# Altium PCB UZ_D_IncrEncd_v2.PcbDoc (part 1 of 2)
Units mm, origin at the board's own origin, x right, y up, seen from the top; angles counter-clockwise.
Board outline 155.99 x 100.01 mm, 2 copper layers (Top Layer, Bottom Layer), stack 0.45 mm thick; 60 components, 97 nets, 455 pads, 49 vias.
Unrouted connection lines stored in the file: 26.
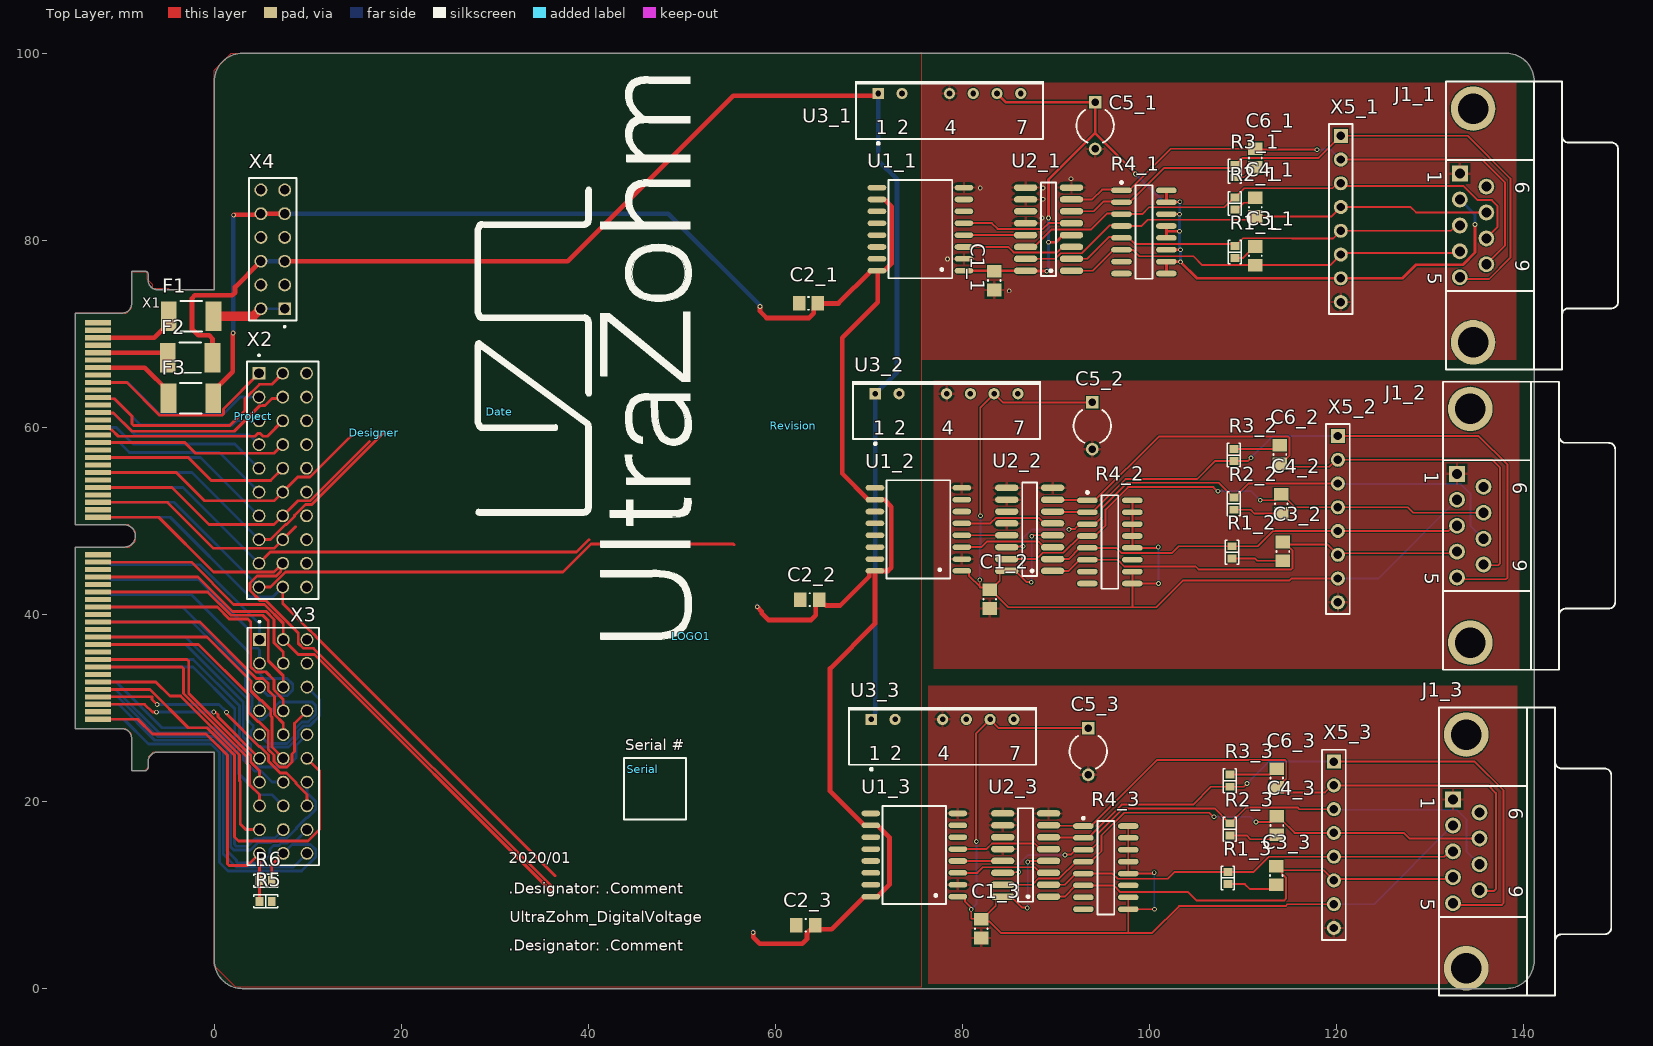
[diagram p0: Top Layer view]
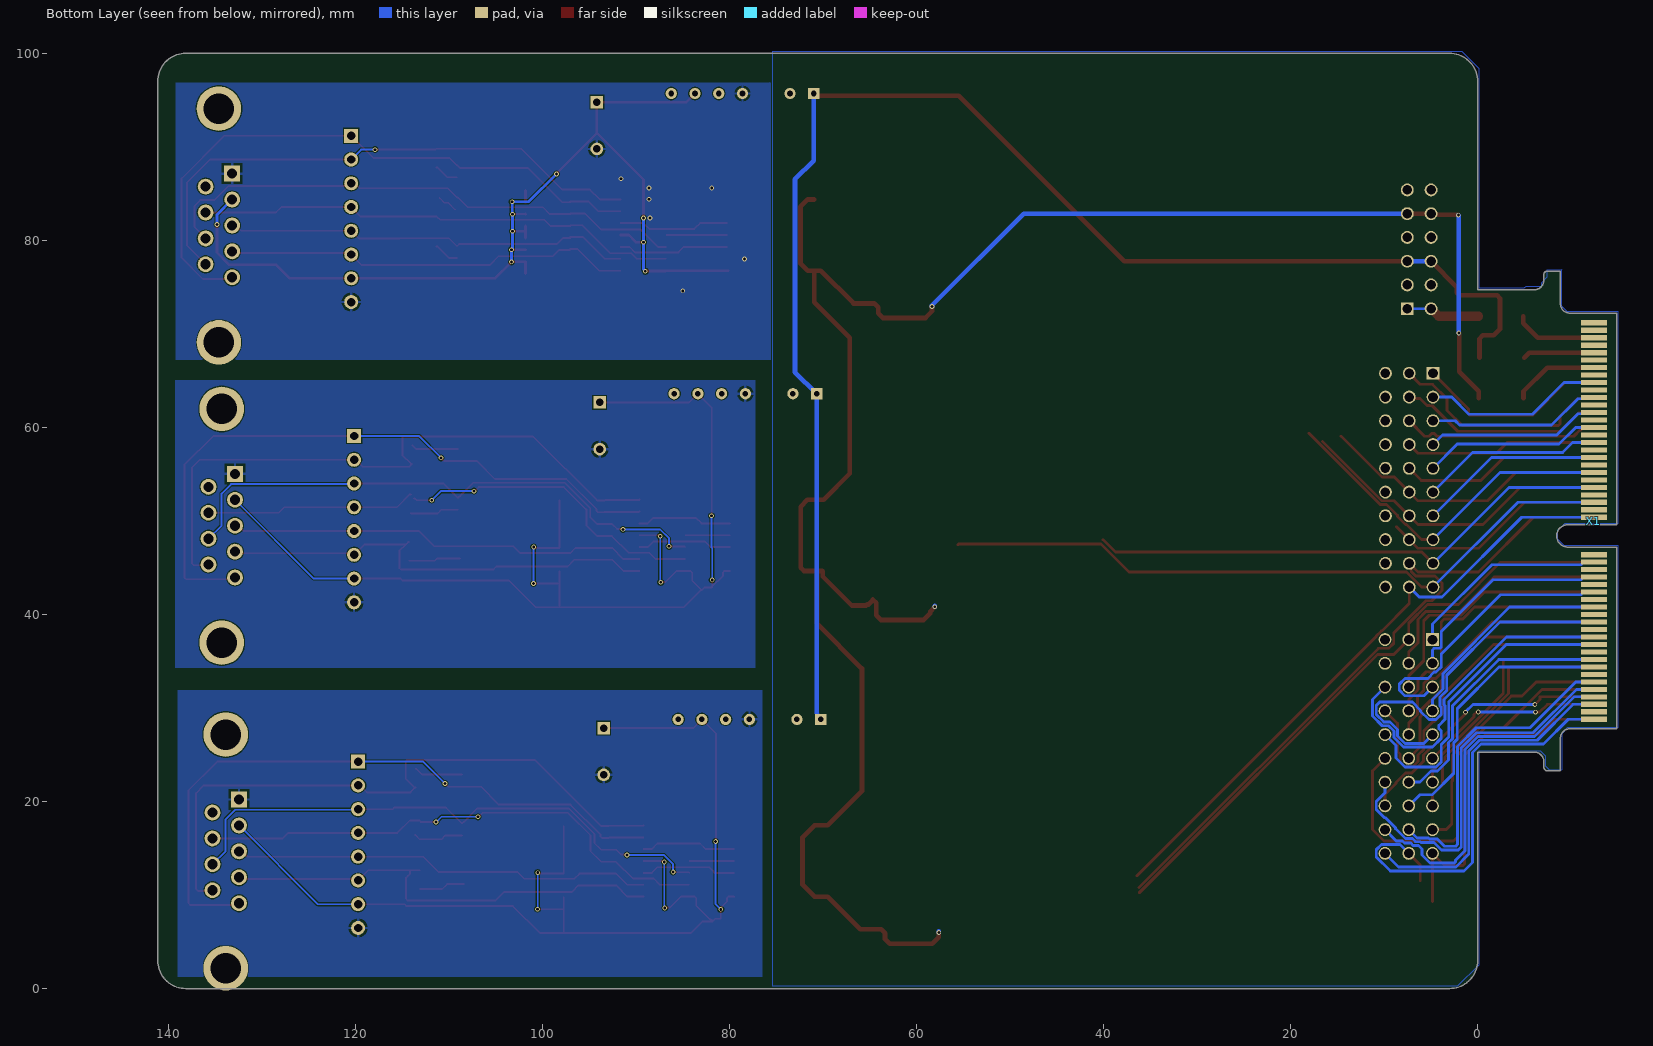
[diagram p1: Bottom Layer view, seen from below]

## Layer stack, top to bottom
Top Solder: solder mask 0.01, Solder Resist, Dk 3.5
Top Layer: signal copper 0.035
Dielectric 1: core 0.38, Core-036, Dk 4.4
Bottom Layer: signal copper 0.035
Bottom Solder: solder mask 0.01, Solder Resist, Dk 3.5

## Board outline
-14.853,27.775 -9.853,27.775 cw(c-9.853,26.775) -8.853,26.775 -8.853,23.275 -7.473,23.275 ccw(c-7.473,23.675) -7.073,23.675 -7.073,24.275 cw(c-6.073,24.275) -6.073,25.275 0,25.275 0,3 ccw(c3,3) 3,0 138.141,0 ccw(c138.141,3) 141.141,3 141.141,97 141.141,97.01 ccw(c138.141,97.01) 138.141,100.01 3,100 ccw(c3,97) 0,97 0,74.725 -6.073,74.725 cw(c-6.073,75.725) -7.073,75.725 -7.073,76.325 ccw(c-7.473,76.325) -7.473,76.725 -8.853,76.725 -8.853,73.225 cw(c-9.853,73.225) -9.853,72.225 -14.853,72.225 -14.853,49.6 -9.653,49.6 cw(c-9.653,48.4) -9.653,47.2 -14.853,47.2

## Design rules (kind name [scope] priority, off if disabled: settings)
AssemblyTestPointUsage [InNetClass('3V3_SingleEnded') or InNetClass('5V_SingleEnded') or InNetClass('15V_SingleEnded') or InNetClass('DifferentialSignals')] p1:
Clearance Clearance_Differential [InNetClass('DifferentialSignals')] p1: gap=0.1 ignorepadtopadclearanceinfootprint=TRUE except(0: Arc-Hole Track-Hole SMDPad-Hole THPad-Hole Via-Hole Fill-Hole Poly-Hole Region-Hole Text-Hole; 0.3: SMDPad-Via; 0.4: THPad-Via)
Clearance Clearance_Power [InNetClass('Power')] p2: gap=0.1 ignorepadtopadclearanceinfootprint=TRUE except(0: Arc-Hole Track-Hole SMDPad-Hole THPad-Hole Via-Hole Fill-Hole Poly-Hole Region-Hole Text-Hole; 0.15: Via-Poly; 0.2: Track-Poly; 0.25: THPad-Poly; 0.3: Fill-Poly Poly-Region; 0.5: Poly-Poly)
Clearance [All] p3: gap=0.1 ignorepadtopadclearanceinfootprint=TRUE except(0: Arc-Hole Track-Hole SMDPad-Hole THPad-Hole Via-Hole Fill-Hole Poly-Hole Region-Hole Text-Hole; 0.4: SMDPad-Via THPad-Via; 0.5: Poly-Poly)
ComponentClearance [All] p1: gap=0.1 collisioncheckmode=3 verticalgap=0.1 showdistances=FALSE
DiffPairsRouting [InNetClass('DifferentialSignals')] p1: maxlimit=0.127 minlimit=0.127 mostfreqgap=0.127 toplayer_minwidth=0.1 toplayer_maxwidth=0.285 toplayer_prefwidth=0.232 bottomlayer_minwidth=0.1 bottomlayer_maxwidth=0.285 bottomlayer_prefwidth=0.232 impedanceprofiledriven=TRUE impedanceprofileid={5F7DE71B-7B0B-4CDE-8AE7-8AD61221F3A5} impedanceprofilevalue=100.000000 maxuncoupledlength=12.7
FanoutControl Fanout_Power [InNetClass('Power') or InNet('ENABLE')] p1: bgadir=Out bgaviamode=Centered fanoutstyle=Auto fanoutdirection=None viagrid=0.025
FanoutControl Fanout_RS422 [InNetClass('DifferentialSignals')] p2: bgadir=Out bgaviamode=Closest fanoutstyle=Rows fanoutdirection=OutOnly viagrid=0.025
FanoutControl Fanout_BGA [IsBGA] p3 off: bgadir=Out bgaviamode=Centered fanoutstyle=Auto fanoutdirection=Alternating viagrid=0.025 // Fanout_BGA (Default Rule)
FanoutControl Fanout_LCC [IsLCC] p4 off: bgadir=Out bgaviamode=Centered fanoutstyle=Auto fanoutdirection=Alternating viagrid=0.025 // Fanout_LCC (Default Rule)
FanoutControl Fanout_SOIC [IsSOIC] p5 off: bgadir=Out bgaviamode=Centered fanoutstyle=Auto fanoutdirection=Alternating viagrid=0.025 // Fanout_SOIC (Default Rule)
FanoutControl Fanout_Small [(CompPinCount < 5)] p6 off: bgadir=Out bgaviamode=Centered fanoutstyle=Auto fanoutdirection=OutThenIn viagrid=0.025 // Fanout_Small (Default Rule)
FanoutControl Fanout_Default [All] p7: bgadir=NE bgaviamode=Closest fanoutstyle=Rows fanoutdirection=InOnly viagrid=0.025 // Fanout_Default (Default Rule)
Height [All] p1: minheight=0 maxheight=50 prefheight=12.7
HoleSize [All] p1: absolutevalues=TRUE maxlimit=4 minlimit=0.025 maxpercent=80.000 minpercent=20.000
PolygonConnect PolygonConnect_Therm [HoleSize > 2.6] p1: connectstyle=Direct reliefconductorwidth=0.254 reliefentries=4 polygonreliefangle="90 Angle" airgapwidth=0.254
PolygonConnect PolygonConnect_via [InPadClass('pad') or IsVia] p2: connectstyle=Direct reliefconductorwidth=0.254 reliefentries=4 polygonreliefangle="90 Angle" airgapwidth=0.254
PolygonConnect [All] p3: connectstyle=Relief reliefconductorwidth=0.3 reliefentries=4 polygonreliefangle="90 Angle" airgapwidth=0.25
RoomDefinition Encoder2 [InComponentClass('Encoder2')] p1: confinementstyle=ConfineIn formatcopy=TRUE lockcomponents=FALSE outline 54.61,33.223 152.756,33.223 152.756,68.174 54.61,68.174
RoomDefinition Encoder3 [InComponentClass('Encoder3')] p2: confinementstyle=ConfineIn formatcopy=TRUE lockcomponents=FALSE outline 54.178,-1.6 152.324,-1.6 152.324,33.35 54.178,33.35
RoomDefinition Connector [InComponentClass('Connector')] p3: confinementstyle=ConfineIn formatcopy=TRUE lockcomponents=FALSE outline -17.069,-8.128 22.936,-8.128 22.936,114.6 -17.069,114.6
RoomDefinition Encoder1 [InComponentClass('Encoder1')] p4: confinementstyle=ConfineIn formatcopy=TRUE lockcomponents=FALSE outline 54.915,65.329 153.06,65.329 153.06,100.279 54.915,100.279
RoomDefinition X1 [InComponentClass('X1')] p5: confinementstyle=ConfineIn formatcopy=TRUE lockcomponents=FALSE outline -46.221,5.207 20.015,5.207 20.015,82.8 -46.221,82.8
RoutingLayers RoutingLayers_3V3Signals [InNetClass('3V3_SingleEnded')] p1 off: top layer_v5=TRUE bottom layer_v5=TRUE
RoutingLayers RoutingLayers_SingleEnded [InNetClass('15V_SingleEnded') or InNetClass('3V3_SingleEnded') or InNetClass('5V_SingleEnded')] p2 off: top layer_v5=TRUE bottom layer_v5=TRUE
RoutingLayers RoutingLayers_Differential [InNetClass('DifferentialSignals')] p3 off: top layer_v5=TRUE bottom layer_v5=FALSE
RoutingLayers [All] p4: top layer_v5=TRUE bottom layer_v5=TRUE
RoutingVias [All] p1: holewidth=0.3 width=0.5 viastyle="Through Hole" minholewidth=0.2 minwidth=0.4 maxholewidth=0.5 maxwidth=1
SolderMaskExpansion [All] p1: expansion=0.102 istentingtop=FALSE
UnRoutedNet UnRoutedNet_Signals [InNetClass('15V_SingleEnded') or InNetClass('3V3_SingleEnded') or InNetClass('5V_SingleEnded') or InNetClass('DifferentialSignals')] p1: checkbadconnections=TRUE
UnRoutedNet [All] p2: checkbadconnections=TRUE
Width Width_Power [InNetClass('Power')] p1: maxlimit=10 minlimit=0.2 preferedwidth=0.3 minimp=50.000000 maximp=50.000000 favimp=50.000000
Width [All] p2: maxlimit=10 minlimit=0.1 preferedwidth=0.2
18 further rules are at their usual default settings.

## Classes and differential pairs
channel class Encoder: Encoder1 Encoder2 Encoder3
component class Encoder2: C1_2 C2_2 C3_2 C4_2 C5_2 C6_2 J1_2 R1_2 R2_2 R3_2 R4_2 U1_2 U2_2 U3_2 X5_2
component class Encoder1: C1_1 C2_1 C3_1 C4_1 C5_1 C6_1 J1_1 R1_1 R2_1 R3_1 R4_1 U1_1 U2_1 U3_1 X5_1
component class Encoder3: C1_3 C2_3 C3_3 C4_3 C5_3 C6_3 J1_3 R1_3 R2_3 R3_3 R4_3 U1_3 U2_3 U3_3 X5_3
component class Connector: F1 F2 F3 X2 X3 X4
component class X1: R5 R6 X1

## Components (designator, comment, footprint, x,y, rotation, side; value= is the part's Value field where it differs from the comment)
C1_1 "0.1 µF" C_0805 83.4,75.7 r90 top (schematic designator C1)
C1_2 "0.1 µF" C_0805 82.906,41.631 r90 top (schematic designator C1)
C1_3 "0.1 µF" C_0805 81.991,6.401 r90 top (schematic designator C1)
C2_1 "0.1 µF" C_0805 63.525,73.254 r0 top (schematic designator C2)
C2_2 "0.1 µF" C_0805 63.669,41.596 r0 top (schematic designator C2)
C2_3 "0.1 µF" C_0805 63.237,6.773 r0 top (schematic designator C2)
C3_1 "0.01 µF" C_0805 111.328,78.348 r270 top (schematic designator C3)
C3_2 "0.01 µF" C_0805 114.262,46.742 r90 top (schematic designator C3)
C3_3 "0.01 µF" C_0805 113.555,12.091 r90 top (schematic designator C3)
C4_1 "0.01 µF" C_0805 111.328,83.55 r270 top (schematic designator C4)
C4_2 "0.01 µF" C_0805 114.071,51.841 r90 top (schematic designator C4)
C4_3 "0.01 µF" C_0805 113.614,17.424 r90 top (schematic designator C4)
C5_1 "10 µF" CAPR5-4X5 94.183,92.278 r270 top (schematic designator C5)
C5_2 "10 µF" CAPR5-4X5 93.878,60.173 r270 top (schematic designator C5)
C5_3 "10 µF" CAPR5-4X5 93.447,25.349 r270 top (schematic designator C5)
C6_1 "0.01 µF" C_0805 111.328,88.8 r90 top (schematic designator C6)
C6_2 "0.01 µF" C_0805 113.944,57.099 r270 top (schematic designator C6)
C6_3 "0.01 µF" C_0805 113.589,22.504 r270 top (schematic designator C6)
Date "2020/01" COMMENT 30.531,61.697 r90 top
Designer "Michaela Hlatky" Designator:comment 17.094,59.436 r90 top
F1 "Littelfuse_PTC_1812" 1812_PTC_Polyfuse_Littelfuse -2.489,71.882 r0 top value="PTC, 1.1 A, 24V"
F2 "Littelfuse_PTC_1812" 1812_PTC_Polyfuse_Littelfuse -2.591,67.462 r0 top value="PTC, 1.1 A, 24V"
F3 "Littelfuse_PTC_1812" 1812_PTC_Polyfuse_Littelfuse -2.515,63.119 r0 top value="PTC, 1.1 A, 24V"
J1_1 "DSUB1.385-2H9" DSUB1.385-2H9 144.1,81.595 r270 top (schematic designator J1)
J1_2 "DSUB1.385-2H9" DSUB1.385-2H9 143.795,49.489 r270 top (schematic designator J1)
J1_3 "DSUB1.385-2H9" DSUB1.385-2H9 143.363,14.666 r270 top (schematic designator J1)
LOGO1 "UZ Logo" UZ_Logo_large 51.003,37.643 r90 top
Project "UltraZohm_DigitalVoltage" COMMENT 4.147,61.188 r90 top
R1_1 "120R" "RES 0603_1608" 109.118,78.749 r270 top (schematic designator R1)
R1_2 "120R" "RES 0603_1608" 108.814,46.644 r270 top (schematic designator R1)
R1_3 "120R" "RES 0603_1608" 108.382,11.821 r270 top (schematic designator R1)
R2_1 "120R" "RES 0603_1608" 109.118,83.951 r270 top (schematic designator R2)
R2_2 "120R" "RES 0603_1608" 109.017,51.846 r270 top (schematic designator R2)
R2_3 "120R" "RES 0603_1608" 108.585,17.023 r270 top (schematic designator R2)
R3_1 "120R" "RES 0603_1608" 109.118,87.4 r270 top (schematic designator R3)
R3_2 "120R" "RES 0603_1608" 109.017,57.048 r90 top (schematic designator R3)
R3_3 "120R" "RES 0603_1608" 108.585,22.225 r90 top (schematic designator R3)
R4_1 "Res Pack3" SO-16_N 99.4,80.9 r0 top value=4.7K (schematic designator R4)
R4_2 "Res Pack3" SO-16_N 95.758,47.752 r0 top value=4.7K (schematic designator R4)
R4_3 "Res Pack3" SO-16_N 95.326,12.929 r0 top value=4.7K (schematic designator R4)
R5 "R_TF" "RES 0603_1608" 5.486,9.322 r180 top value=0R
R6 "R_TF" "RES 0603_1608" 5.486,11.532 r0 top value=0R
Revision "1v00" Designator:comment 61.874,60.173 r90 top
Serial "Serial #" SERIAL 45.822,23.47 r0 top
U1_1 "ISO7230MDW" "TI ISO7230 SOIC" 75.5,81.2 r180 top (schematic designator U1)
U1_2 "ISO7230MDW" "TI ISO7230 SOIC" 75.284,49.098 r180 top (schematic designator U1)
U1_3 "ISO7230MDW" "TI ISO7230 SOIC" 74.852,14.275 r180 top (schematic designator U1)
U2_1 "DS26LS32ACM" M16A_M 89.2,81.2 r180 top (schematic designator U2)
U2_2 "DS26LS32ACM" M16A_M 87.184,49.098 r180 top (schematic designator U2)
U2_3 "DS26LS32ACM" M16A_M 86.752,14.275 r180 top (schematic designator U2)
U3_1 "TMH 0505S" SIL-6(7) 78.605,95.708 r0 top (schematic designator U3)
U3_2 "TMH 0505S" SIL-6(7) 78.3,63.602 r0 top (schematic designator U3)
U3_3 "TMH 0505S" SIL-6(7) 77.869,28.779 r0 top (schematic designator U3)
X1 "HSEC8-150-01-XX-DV-A-BL-CARD" HSEC8-150-01-XX-DV-A-BL-CARD -14.84,49.991 r270 bottom
X2 "Pin Header" SAMTEC_TSW-110-07-F-T 7.315,54.356 r270 top
X3 "Pin Header" SAMTEC_TSW-110-07-F-T 7.366,25.883 r270 top
X4 "Pin Header" SAMTEC_TSW-106-07-F-D 6.248,79.045 r90 top
X5_1 "Pin Header" HDR1X8 120.447,91.186 r270 top (schematic designator X5)
X5_2 "Pin Header" HDR1X8 120.142,59.08 r270 top (schematic designator X5)
X5_3 "Pin Header" HDR1X8 119.71,24.257 r270 top (schematic designator X5)

## Footprints (in the part's own frame and the unit in brackets; to place one, negate y for a bottom-side part, rotate by r counter-clockwise, add the part's x,y. Pads: shape width x height; smd on the part's side, far side on the other; paste and mask are expansions set on the pad)
1812_PTC_Polyfuse_Littelfuse [mm] "Chip Fuse, 2-Leads, Body 4.6x3.24mm"
  rect 1.68x3.14 smd: 1(-2.39,0) 2(2.39,0)
  silkscreen extent -1.15,-1.62 1.15,1.62, body extent -2.3,-1.62 2.3,1.62, height 1.15
C_0805 [mm] "Chip Capacitor, Body 2.0x1.2mm, Height 1.45mm, IPC Low Density"
  rect 1.35x1.55 smd: 1(-1,0) 2(1,0)
  silkscreen extent -0.05,-0.67 0.05,0.67, body extent -1.1,-0.72 1.1,0.72, height 1.45
CAPR5-4X5 [mm] "Capacitor; 2 Leads"
  rect 1.35x1.35 hole 0.8: 1(-2.5,0)
  round 1.35 hole 0.8: 2(2.5,0)
  silkscreen extent -1.69,-2 1.82,2
COMMENT [mm] "prints out the comment of a component"
Designator:comment [mm] "prints out designator and comment of a component"
DSUB1.385-2H9 [mm] "Connector; D Subminiature; 9 Position; Right Angle; Pitch 1.385 mm"
  rect 1.69x1.69 hole 1.09: 1(-5.54,-10.92)
  round 1.69 hole 1.09: 2(-2.77,-10.92) 3(0,-10.92) 4(2.77,-10.92) 5(5.54,-10.92) 6(-4.155,-8.08) 7(-1.385,-8.08) 8(1.385,-8.08) 9(4.155,-8.08)
  round 4.76 hole 3.26: 10(-12.495,-9.5) 11(12.495,-9.5)
  silkscreen extent -15.4,-12.4 15.4,6
HDR1X8 [mm] "Connector; Header; 8 Position"
  rect 1.5x1.5 hole 0.9: 1(0,0)
  round 1.5 hole 0.9: 2(2.54,0) 3(5.08,0) 4(7.62,0) 5(10.16,0) 6(12.7,0) 7(15.24,0) 8(17.78,0)
  silkscreen extent -1.27,-1.27 19.05,1.27
HSEC8-150-01-XX-DV-A-BL-CARD [mm]
  rect 0.55x2.8 smd far side mask+0.05: 1(-21.2,-2.4) 3(-20.4,-2.4) 5(-19.6,-2.4) 7(-18.8,-2.4) 9(-18,-2.4) 11(-17.2,-2.4) 13(-16.4,-2.4) 15(-15.6,-2.4) 17(-14.8,-2.4) 19(-14,-2.4) 21(-13.2,-2.4) 23(-12.4,-2.4) 25(-11.6,-2.4) 27(-10.8,-2.4) 29(-10,-2.4) 31(-9.2,-2.4) 33(-8.4,-2.4) 35(-7.6,-2.4) 37(-6.8,-2.4) 39(-6,-2.4) 41(-5.2,-2.4) 43(-4.4,-2.4) 45(-3.6,-2.4) 47(-2.8,-2.4) 49(-2,-2.4) 51(-1.2,-2.4) 53(-0.4,-2.4) 55(3.6,-2.4) 57(4.4,-2.4) 59(5.2,-2.4) 61(6,-2.4) 63(6.8,-2.4) 65(7.6,-2.4) 67(8.4,-2.4) 69(9.2,-2.4) 71(10,-2.4) 73(10.8,-2.4) 75(11.6,-2.4) 77(12.4,-2.4) 79(13.2,-2.4) 81(14,-2.4) 83(14.8,-2.4) 85(15.6,-2.4) 87(16.4,-2.4) 89(17.2,-2.4) 91(18,-2.4) 93(18.8,-2.4) 95(19.6,-2.4) 97(20.4,-2.4) 99(21.2,-2.4)
  rect 0.55x2.8 smd mask+0.05: 2(-21.2,-2.4) 4(-20.4,-2.4) 6(-19.6,-2.4) 8(-18.8,-2.4) 10(-18,-2.4) 12(-17.2,-2.4) 14(-16.4,-2.4) 16(-15.6,-2.4) 18(-14.8,-2.4) 20(-14,-2.4) 22(-13.2,-2.4) 24(-12.4,-2.4) 26(-11.6,-2.4) 28(-10.8,-2.4) 30(-10,-2.4) 32(-9.2,-2.4) 34(-8.4,-2.4) 36(-7.6,-2.4) 38(-6.8,-2.4) 40(-6,-2.4) 42(-5.2,-2.4) 44(-4.4,-2.4) 46(-3.6,-2.4) 48(-2.8,-2.4) 50(-2,-2.4) 52(-1.2,-2.4) 54(-0.4,-2.4) 56(3.6,-2.4) 58(4.4,-2.4) 60(5.2,-2.4) 62(6,-2.4) 64(6.8,-2.4) 66(7.6,-2.4) 68(8.4,-2.4) 70(9.2,-2.4) 72(10,-2.4) 74(10.8,-2.4) 76(11.6,-2.4) 78(12.4,-2.4) 80(13.2,-2.4) 82(14,-2.4) 84(14.8,-2.4) 86(15.6,-2.4) 88(16.4,-2.4) 90(17.2,-2.4) 92(18,-2.4) 94(18.8,-2.4) 96(19.6,-2.4) 98(20.4,-2.4) 100(21.2,-2.4)
M16A_M [mm] "SOIC, 16-Leads, Body 9.9x3.9mm, Pitch 1.27mm, IPC Low Density"
  oval 2.5x0.7 smd: 1(-2.45,4.445) 2(-2.45,3.175) 3(-2.45,1.905) 4(-2.45,0.635) 5(-2.45,-0.635) 6(-2.45,-1.905) 7(-2.45,-3.175) 8(-2.45,-4.445) 9(2.45,-4.445) 10(2.45,-3.175) 11(2.45,-1.905) 12(2.45,-0.635) 13(2.45,0.635) 14(2.45,1.905) 15(2.45,3.175) 16(2.45,4.445)
  silkscreen extent -0.8,-5 0.8,5, body extent -2,-5 2,5, height 1.75
"RES 0603_1608" [mm] "Chip Resistor, 2-Leads, Body 1.60x0.80mm, IPC Medium Density"
  rect 0.85x0.95 smd: 1(-0.65,0) 2(0.65,0)
  silkscreen extent -1.27,-0.7 1.27,0.7, body extent -0.8,-0.4 0.8,0.4, height 0.45
SAMTEC_TSW-106-07-F-D [mm]
  rect 1.37x1.37 hole 1.02: 01(-6.35,-1.27)
  round 1.37 hole 1.02: 02(-6.35,1.27) 03(-3.81,-1.27) 04(-3.81,1.27) 05(-1.27,-1.27) 06(-1.27,1.27) 07(1.27,-1.27) 08(1.27,1.27) 09(3.81,-1.27) 10(3.81,1.27) 11(6.35,-1.27) 12(6.35,1.27)
  silkscreen extent -8.37,-2.54 7.62,2.54
SAMTEC_TSW-110-07-F-T [mm]
  rect 1.37x1.37 hole 1.02: 01(-11.43,-2.54)
  round 1.37 hole 1.02: 02(-11.43,0) 03(-11.43,2.54) 04(-8.89,-2.54) 05(-8.89,0) 06(-8.89,2.54) 07(-6.35,-2.54) 08(-6.35,0) 09(-6.35,2.54) 10(-3.81,-2.54) 11(-3.81,0) 12(-3.81,2.54) 13(-1.27,-2.54) 14(-1.27,0) 15(-1.27,2.54) 16(1.27,-2.54) 17(1.27,0) 18(1.27,2.54) 19(3.81,-2.54) 20(3.81,0) 21(3.81,2.54) 22(6.35,-2.54) 23(6.35,0) 24(6.35,2.54) 25(8.89,-2.54) 26(8.89,0) 27(8.89,2.54) 28(11.43,-2.54) 29(11.43,0) 30(11.43,2.54)
  silkscreen extent -13.45,-3.81 12.7,3.81
SERIAL [mm]
  silkscreen extent -2,-5.4 4.6,1.2
SIL-6(7) [mm] "SIP; 7 Leads (1 Absent); Body 19.5 x 6 mm (LxW typ); Pitch 2.54 mm"
  rect 1.2x1.2 hole 0.6: 1(-7.62,0)
  round 1.2 hole 0.6: 2(-5.08,0) 4(0,0) 5(2.54,0) 6(5.08,0) 7(7.62,0)
  silkscreen extent -10.1,-5.46 10.1,1.35, body extent -10.13,-6.47 9.37,1.13, height 10.5
SO-16_N [mm] "SOIC, 16-Leads, Body 9.9x3.9mm, Pitch 1.27mm, IPC Medium Density"
  oval 2.2x0.6 smd: 1(-2.4,4.445) 2(-2.4,3.175) 3(-2.4,1.905) 4(-2.4,0.635) 5(-2.4,-0.635) 6(-2.4,-1.905) 7(-2.4,-3.175) 8(-2.4,-4.445) 9(2.4,-4.445) 10(2.4,-3.175) 11(2.4,-1.905) 12(2.4,-0.635) 13(2.4,0.635) 14(2.4,1.905) 15(2.4,3.175) 16(2.4,4.445)
  silkscreen extent -2.52,-5 0.9,5.42, body extent -2,-5 2,5, height 1.75
"TI ISO7230 SOIC" [mm] "SOIC, 16-Leads, Body 10,30x7,50mm, Pitch 1,27mm, IPC Medium Density"
  oval 2x0.6 smd: 1(-4.65,4.445) 2(-4.65,3.175) 3(-4.65,1.905) 4(-4.65,0.635) 5(-4.65,-0.635) 6(-4.65,-1.905) 7(-4.65,-3.175) 8(-4.65,-4.445) 9(4.65,-4.445) 10(4.65,-3.175) 11(4.65,-1.905) 12(4.65,-0.635) 13(4.65,0.635) 14(4.65,1.905) 15(4.65,3.175) 16(4.65,4.445)
  silkscreen extent -3.4,-5.25 3.4,5.25, body extent -3.8,-5.25 3.8,5.25, height 2.65
UZ_Logo_large [mm] "logo width 6cm"
  silkscreen extent -0.3,-0.06 59.86,23.1

## Part data
C1_1 C1_2 C1_3 C2_1 C2_2 C2_3: library part C0805C104J5RECTU, "Capacitor 0805, 50 VDC, 0.1 µF, X7R", Device Package=0805, Manufacturer=KEMET, Operating Temperature="-55 - 125°C", Supplier Part Number 1=80-C0805C104J5RECTU, Tolerance="5 %", Voltage Rating="50 VDC", Component Type="Capacitor 0805", ComponentLink1Description=Datasheet, ComponentLink1URL=https://www.mouser.de/datasheet/2/212/KEM_C1002_X7R_SMD-1102033.pdf, Created from=MGremer, Created On="20.12.2020 13:54:13", Last Updated="20.12.2020 16:34:30", Live Cycle Status=1, Manufacturer Part Number=C0805C104J5RECTU, Mounting Type=SMD, PartID=17, Series="SMD Comm X7R", Stock number="Labor SMD Container", Supplier 1=Mouser, Type=Capacitor
C3_1 C3_2 C3_3 C4_1 C4_2 C4_3 C6_1 C6_2 C6_3: library part GRM21BR72A103KA01L, "Capacitor 0805, 100 VDC, 0.01 µF, X7R", Device Package=0805, Manufacturer="Murata Electronics", Operating Temperature="-55 - 125°C", Supplier Part Number 1=81-GRM21BR72A103K, Tolerance="10 %", Voltage Rating="100 VDC", Component Type="Capacitor 0805", ComponentLink1Description=Datasheet, ComponentLink1URL=https://www.mouser.de/datasheet/2/281/1/GRM21BR72A103KA01_01C-1986947.pdf, Created from=MGremer, Created On="20.12.2020 13:54:13", Last Updated="17.11.2021 11:27:00", Live Cycle Status=1, Manufacturer Part Number=GRM21BR72A103KA01L, Mounting Type=SMD, PartID=86, Series=GRM, Stock number="not stored", Supplier 1=Mouser, Type=Capacitor
C5_1 C5_2 C5_3: library part CAPR5-4X5, "Capacitor; 2 Leads", Component Type=Capacitor, ComponentLink1Description=Datasheet, Created from=MHlatky, Created On="25.05.2021 10:46:00", Last Updated="30.11.2021 13:37:41", Live Cycle Status=1, Manufacturer Part Number=CAPR5-4X5, PackageDescription="Capacitor; 2 Leads", PackageReference=CAPR5-4X5, PartID=5, Published=23-Sep-2002, Publisher="Altium Limited", Supplier Part Number 1=CAPR5-4X5, Type=Capacitor
Date: library part 5, "Create a project parameter named \"FinDate\" this is the value of this component. It is printed on the PCB. Once the parameter is updated (e.g. new revision) it gets updated on the PCB as well", Manufacturer="PCB Manufacturer", Manufacturer Part Number="Project End Date", Component Type="Date of Project Finalization", Created from="T. Wendt", Created On="01.03.2021 09:01:41", Last Updated="01.03.2021 09:01:41", Live Cycle Status=1, PartID=5, Type="Standard (No BOM)"
Designer: library part 4, "Create a project parameter named \"Author\" this is the value of this component. It is printed on the PCB. Once the parameter is updated (e.g. new revision) it gets updated on the PCB as well", Manufacturer="PCB Manufacturer", Manufacturer Part Number="Project Author", Component Type="Project Author", Created from="T. Wendt", Created On="01.03.2021 08:53:41", Last Updated="01.03.2021 09:20:27", Live Cycle Status=1, PartID=4, Type="Standard (No BOM)"
F1 F2 F3: "POLYSWITCH RESETTABLE DEVICES", Hold Current=1.1A, Manufacturer=Littelfuse, MPN=miniASMDC110F/24, Nominal current="1 A", Operating Temperature="-40 - 85 °C", Package=1812, Resistance="0.18 Ohm", Trip Current=2.2A, Voltage=24V, Component Type=Littelfuse_PTC_1812, ComponentLink1Description=Datasheet, ComponentLink1URL=https://www.littelfuse.com/~/media/electronics/datasheets/resettable_ptcs/littelfuse_ptc_surface_mount_catalog_datasheet.pdf.pdf, Created=2019_02_10_AGeiger, Created from=MHlatky, Created On="07.05.2021 06:50:33", Last Updated="20.12.2021 12:44:16", Live Cycle Status=1, Manufacturer Part Number=Littelfuse_PTC_1812, MF=Littelfuse, Mounting Type=SMD, PartID=5, Type=Fuse
J1_1 J1_2 J1_3: "Connector; D Subminiature; 9 Position; Right Angle; Pitch 1.385 mm", Device Package=-, Manufacturer=Altium, PackageDocument=O, Component Type="DSUB Connector", ComponentLink1Description=Datasheet, ComponentLink1URL=[NULL], Created from=MHlatky, Created On="26.01.2021 09:19:51", DatasheetDocument=1-Sep-1999, Gender=Receptacle, Last Updated="20.12.2021 09:43:18", LatestRevisionDate=17-Jul-2002, LatestRevisionNote="Re-released for DXP Platform.", Live Cycle Status=1, Manufacturer Part Number=DSUB1.385-2H9, Orientation="Right Angle", PackageReference=788750, PartID=15, Positions=9, Published=15-Jun-2001, Publisher="Altium Limited", Stock number="not stored", Type="DSUB Connector"
LOGO1: library part 1, "Official Project Logo of the UltraZohm", Manufacturer="PCB Manufacturer", Manufacturer Part Number="UltraZohm Logo", Component Type=Logo, ComponentLink1Description=Homepage, ComponentLink1URL=https://ultrazohm.com, Created from="T. Wendt", Created On="19.02.2021 16:55:56", Last Updated="02.03.2021 14:31:24", Live Cycle Status=1, PartID=1, Type="Standard (No BOM)"
Project: library part 2, "Create a project parameter named \"ProjectNameCustom\" this is the value of this component and it is printed on the PCB.", Manufacturer="PCB Manufacturer", Manufacturer Part Number="Project Name", Component Type="Project Name", Created from="T. Wendt", Created On="01.03.2021 08:43:57", Last Updated="01.03.2021 09:07:27", Live Cycle Status=1, PartID=2, Type="Standard (No BOM)"
R1_1 R1_2 R1_3 R2_1 R2_2 R2_3 R3_1 R3_2 R3_3: library part RK73B1JTTD121J, "SMD resistor E24 series", Device Package=0603, Manufacturer="KOA Speer", Supplier Part Number 1=660-RK73B1JTTD121J, Tolerance=5%, Component Type="SMD resistor", ComponentLink1Description=Datasheet, ComponentLink1URL=https://www.mouser.de/datasheet/2/219/RK73B-1825463.pdf, Created from=MGremer, Created On="14.12.2020 16:17:14", Last Updated="02.03.2021 14:07:32", Live Cycle Status=1, Manufacturer Part Number=RK73B1JTTD121J, Mounting Type=SMD, PartID=52, Stock number="Labor SMD Container", Supplier 1=Mouser, Type=Resistor
R4_1 R4_2 R4_3: "SOIC, 16-Leads, Body 9.9x3.9mm, Pitch 1.27mm, IPC Medium Density", Device Package=SOIC, Code_IPC=SOIC127P600-16, Code_JEDEC=MS-012-AC, Component Type="Res Pack3", ComponentLink1Description=Datasheet, Created from=MHlatky, Created On="14.12.2020 16:17:14", Last Updated="20.12.2021 09:54:47", LatestRevisionDate=29-May-2009, LatestRevisionNote="IPC-7351 Footprint Added.", Live Cycle Status=1, Manufacturer Part Number="Res Pack3", Mounting Type=SMD, PackageDescription="16-Pin Small Outline Integrated Circuit 1.27 mm Pitch", PackageReference=SO-16, PartID=207, Published=24-Mar-1999, Publisher="Altium Limited", Supplier 1=Altium, Type=Resistor
R5 R6: library part RC0603JR-070RL, "SMD resistor E24 series", Device Package=0603, LCSC Part Number=C21189, Manufacturer=YAGEO, Supplier Part Number 1=603-RC0603JR-070RL, Tolerance=5%, Component Type="SMD resistor", ComponentLink1Description=Datasheet, ComponentLink1URL=https://www.mouser.de/datasheet/2/447/PYu-RC_Group_51_RoHS_L_10-1664068.pdf, Created from=MGremer, Created On="14.12.2020 16:17:14", Last Updated="04.03.2021 09:09:42", Live Cycle Status=1, Manufacturer Part Number=RC0603JR-070RL, Mounting Type=SMD, PartID=1, Stock number="Labor SMD Container", Supplier 1=Mouser, Supplier 2=LCSC, Supplier Part Number 2=C21189, Type=Resistor
Revision: library part 3, "Create a project parameter named \"ProjectRevision\" this is the value of this component. It is printed on the PCB. Once the parameter is updated (e.g. new revision) it gets updated on the PCB as well", Manufacturer="PCB Manufacturer", Manufacturer Part Number="Project Revision", Component Type="Project Revision", Created from="T. Wendt", Created On="01.03.2021 08:50:34", Last Updated="01.03.2021 09:28:36", Live Cycle Status=1, PartID=3, Type="Standard (No BOM)"
Serial: library part 6, "Field to put in a serial number", Manufacturer="PCB Manufacturer", Manufacturer Part Number="Serial Number", Component Type="Serial Number", Created from="T. Wendt", Created On="02.03.2021 14:31:24", Last Updated="02.03.2021 14:31:24", Live Cycle Status=1, PartID=6, Type="Standard (No BOM)"
U1_1 U1_2 U1_3: "ISO723xx High-Speed, Triple-Channel Digital Isolators", Manufacturer="Analog Devices", Operating Temperature="-40 - +125 °C", Supplier Part Number 1=595-ISO7230MDW, Component Type=Microcontroller, ComponentLink1Description=Datasheet, ComponentLink1URL=https://www.ti.com/lit/ds/symlink/iso7230m.pdf?HQS=dis-mous-null-mousermode-dsf-pf-null-wwe&ts=1639988443497&ref_url=https%253A%252F%252Fwww.mouser.de%252F, Created from=MHlatky, Created On="26.01.2021 09:03:43", Last Updated="17.06.2021 08:32:47", Live Cycle Status=1, Manufacturer Part Number=ISO7230MDW, Mounting Type=SOIC, PartID=5, Stock number="not stored", Supplier 1=Mouser, Type=Microcontroller
U2_1 U2_2 U2_3: "DS26LS32AC/DS26LS32C/DS26LS32M/DS26LS33M Quad Differential Line Receivers", Manufacturer="Texas Instruments", Operating Temperature="0 - 70 °C", PackageTopMarking=NSUZXYTTE#*DS26LS32*ACM, PowerWise=N, Supplier Part Number 1=926-DS26LS32ACM, Code_IPC=SOIC127P600-16, Code_JEDEC=MS-012-AC, Component Type=Microcontroller, ComponentLink1Description=Datasheet, ComponentLink1URL=https://media.digikey.com/pdf/Data%20Sheets/Texas%20Instruments%20PDFs/DS26LS32AC,C,M,DS26LS33M.pdf, ComponentLink2Description="DS26LS32AC Web Page", ComponentLink2URL=http://www.national.com/pf/DS/DS26LS32AC.html, ComponentLink3Description="M16A Package Page", ComponentLink3URL=http://www.national.com/packaging/folders/m16a.html, CompType="Interface IC", Created from=MHlatky, Created On="26.01.2021 09:03:43", DatasheetVersion=May-1999, Last Updated="17.06.2021 08:32:47", Live Cycle Status=1, Manufacturer Part Number=DS26LS32ACM, Mounting Type=SOIC, PackageDescription="Molded Package, SO, .150in Wide, 16 Lead", PackageReference=M16A, PackageVersion="revJ, Aug-1995", PartID=6, PartNumber=DS26LS32ACM, PinCount=16, Published=4-Dec-2008, Publisher="Altium Limited", RoHS=N, Stock number="not stored", Supplier 1=Mouser, Type=Microcontroller
U3_1 U3_2 U3_3: "ISOLIERTE DC-DC-WANDLER Product Type: DC/DC; Package Style: SIP; Output Power (W): 2; Input Voltage: 5 VDC +/-10%; Output 1 (Vdc): 5; Output 2 (Vdc): N/A; Output 3 (Vdc): N/A", Device Package=SIP, Manufacturer=Traco, Operating Temperature="-40 - 85 °C", Supplier Part Number 1=495-TMH-0505S, Component Type="DC-DC Converter", ComponentLink1Description=Datasheet, ComponentLink1URL=https://www.tracopower.com/products/tmh.pdf, Created from=MHlatky, Created On="16.11.2021 07:44:11", Last Updated="16.11.2021 07:44:11", Live Cycle Status=1, Manufacturer Part Number="TMH 0505S", Mounting Type=SMD, PartID=20, Series=TMH, Stock number="not stored", Supplier 1=Mouser, Type="isolated DC-DC Converter"
X1: "Mating Card Layout for HSEC8-150-01-XX-DV-A-BL", Manufacturer=SAMTEC, Created=2018_04_23_AGeiger
X2 X3: library part TSW-110-07-F-T, "THROUGH-HOLE .025\" SQ POST HEADER", Device Package=THT, Manufacturer=SAMTEC, Operating Temperature="-55 +125 °C", Package=None, Supplier Part Number 1=200-TSW11007FT, Availability=Unavailable, Component Type="Pin Header", ComponentLink1Description=Datasheet, ComponentLink1URL=https://www.mouser.de/datasheet/2/527/tsw_th-2854687.pdf, Created from=MHlatky, Created On="22.11.2021 15:31:45", Last Updated="20.12.2021 07:38:08", Live Cycle Status=1, Manufacturer Part Number=TSW-110-07-F-T, MF="Samtec Inc.", Mounting Type=THT, MP=TSW-110-07-F-T, PartID=7, Price=None, Series=TSW, Stock number="not stored", Supplier 1=Mouser, Type="Pin Header"
X4: library part TSW-106-07-F-D, "THROUGH-HOLE .025\" SQ POST HEADER", Device Package=THT, Manufacturer=SAMTEC, Operating Temperature="-55 +125 °C", Package=None, Supplier Part Number 1=200-TSW10607FD, Availability=Unavailable, Component Type="Pin Header", ComponentLink1Description=Datasheet, ComponentLink1URL=https://www.mouser.de/datasheet/2/527/tsw_th-2854687.pdf, Created from=MHlatky, Created On="22.11.2021 15:31:45", Last Updated="20.12.2021 07:38:08", Live Cycle Status=1, Manufacturer Part Number=TSW-106-07-F-D, MF=Samtec, Mounting Type=THT, MP=TSW-106-07-F-D, PartID=8, Price=None, Series=TSW, Stock number="not stored", Supplier 1=Mouser, Type="Pin Header"
X5_1 X5_2 X5_3: library part HDR1X8, "8 Pin", Component Type="Pin Header", ComponentLink1Description=Datasheet, Created from=MHlatky, Created On="22.11.2021 15:31:45", Last Updated="20.12.2021 07:38:08", Live Cycle Status=1, Manufacturer Part Number=HDR1X8, PartID=9, Stock number="not stored", Supplier 1=Altium, Supplier Part Number 1=HDR1X8, Type="Pin Header"

## Via types
v1: diameter 0.5, hole 0.3, Top Layer to Bottom Layer, 49 vias

## Nets (pads, with @x,y where several pads share a name; then routed paths per layer and width w, separated by ;. In a path a pad name is that pad's centre, name@x,y a point inside that pad or via, vN(x,y) a via of type N, cw(c..) or ccw(c..) an arc to the next point about the centre after c; other vN are vias at no path point)
3V3_PER: F3.1 X1.13 X1.14 | length 9.3
  Top Layer w0.5: X1.13@-12.44,66.391 -7.447,66.391 -4.905,63.849 F3.1@-4.905,63.119
3V3_PER_fused: C2_1.2 C2_2.2 C2_3.2 F3.2 U1_1.10 U1_1.16 U1_2.10 U1_2.16 U1_3.10 U1_3.16 X4.09 X4.10 | length 219.7
  Top Layer w0.5: F3.2@-0.125,63.119 -0.125,63.849 1.981,65.955 1.981,70.079 v1(2.007,70.104) ; v1(2.057,82.702) 2.096,82.741 4.864,82.741 X4.10@4.978,82.855 X4.09@7.518,82.855 ; v1(57.609,5.997) 57.609,5.476 58.306,4.779 62.864,4.779 63.364,5.279 63.364,5.9 63.789,6.325 65.997,6.325 69.502,9.83 70.902,9.83 72.187,11.115 72.187,16.165 70.902,17.45 U1_3.10@70.202,17.45 69.502,17.45 65.837,21.115 65.837,34.214 70.634,39.011 U1_2.16@70.634,44.653 ; v1(58.041,40.82) 58.549,40.312 58.549,40.107 59.246,39.41 63.804,39.41 64.304,39.91 64.304,41.231 C2_2.2@64.669,41.596 64.669,41.496 65.094,41.071 65.271,41.071 65.387,40.956 66.937,40.956 70.041,44.061 70.041,44.607 70.088,44.653 U1_2.16@70.634,44.653 ; v1(58.346,72.925) 58.346,72.404 59.043,71.708 63.6,71.708 64.1,72.208 64.1,72.829 C2_1.2@64.525,73.254 66.733,73.254 70.239,76.759 U1_1.16@70.939,76.759 ; U1_1.10@70.939,84.379 71.639,84.379 72.415,83.602 72.415,77.536 71.639,76.759 U1_1.16@70.939,76.759 ; U1_2.16@70.634,44.653 72.034,44.653 72.392,45.011 72.392,51.531 71.669,52.254 70.653,52.254 U1_2.10@70.634,52.273 69.934,52.273 67.132,55.075 67.132,69.571 70.939,73.377 U1_1.16@70.939,76.759
  Bottom Layer w0.5: v1(2.007,70.104) 2.007,82.652 v1(2.057,82.702) ; X4.09@7.518,82.855 48.539,82.855 58.346,73.048 v1(58.346,72.925) ; v1(57.609,5.997) v1@57.609,6.12 ; v1(58.041,40.82) v1@58.041,40.943
5V_PER: F2.1 X1.9 X1.10 | length 7.7
  Top Layer w0.5: X1.9@-12.44,67.991 -5.509,67.991 F2.1@-4.981,67.462
5V_PER_fused: F2.2 U3_1.1 U3_2.1 U3_3.1 X4.05 X4.06 | length 159.6
  Top Layer w0.5: F2.2@-0.201,67.462 -0.201,69.482 -0.564,69.845 -1.723,69.845 -2.388,70.51 -2.388,73.824 -2.095,74.117 1.919,74.117 2.212,74.41 2.212,75.008 X4.06@4.978,77.775 ; X4.05@7.518,77.775 37.795,77.775 55.474,95.453 70.731,95.453 U3_1.1@70.985,95.708
  Bottom Layer w0.5: X4.06@4.978,77.775 X4.05@7.518,77.775 ; U3_3.1@70.249,28.779 70.599,29.129 70.599,29.34 70.68,29.422 U3_2.1@70.68,63.602 73,65.921 73,86.512 70.985,88.527 U3_1.1@70.985,95.708
A+_1: J1_1.3 R1_1.1 R4_1.5 U2_1.2 X5_1.5 | length 43.8
  Top Layer w0.2: U2_1.2@91.665,78.029 93.329,78.029 95.646,80.346 96.01,80.346 96.015,80.342 97.034,80.342 R4_1.5@97.039,80.346 ; R4_1.5@97,80.265 97.8,80.265 98.465,79.6 108.918,79.6 R1_1.1@109.118,79.399 109.168,79.399 109.992,80.223 115.177,80.223 115.2,80.2 119.621,80.2 X5_1.5@120.447,81.026 132.235,81.026 132.804,81.595 J1_1.3@133.18,81.595
A+_2: J1_2.3 R1_2.1 R4_2.5 U2_2.2 X5_2.5 | length 45.2
  Top Layer w0.2: U2_2.2@89.634,45.923 91.364,45.923 92.558,47.117 R4_2.5@93.358,47.117 96.466,47.117 97.016,46.567 102.389,46.567 103.116,47.294 R1_2.1@108.814,47.294 111.562,47.294 113.189,48.92 X5_2.5@120.142,48.92 131.93,48.92 132.499,49.489 J1_2.3@132.875,49.489
A+_3: J1_3.3 R1_3.1 R4_3.5 U2_3.2 X5_3.5 | length 45.2
  Top Layer w0.2: U2_3.2@89.202,11.1 90.932,11.1 92.126,12.294 R4_3.5@92.926,12.294 96.034,12.294 96.584,11.744 101.957,11.744 102.684,12.471 R1_3.1@108.382,12.471 111.13,12.471 112.757,14.097 X5_3.5@119.71,14.097 131.498,14.097 132.067,14.666 J1_3.3@132.443,14.666
A-_1: C3_1.2 J1_1.4 R4_1.6 U2_1.1 X5_1.6 | length 43.8
  Top Layer w0.2: U2_1.1@91.665,76.759 93.921,76.759 96.239,79.076 R4_1.6@97.039,79.076 ; R4_1.6@97,78.995 97.022,78.973 98.227,78.973 98.9,78.3 104.7,78.3 105.652,77.348 C3_1.2@111.328,77.348 119.309,77.348 X5_1.6@120.447,78.486 120.616,78.655 133.011,78.655 J1_1.4@133.18,78.825
A-_2: C3_2.2 J1_2.4 R4_2.6 U2_2.1 X5_2.6 | length 49.8
  Top Layer w0.2: U2_2.1@89.634,44.653 91.364,44.653 R4_2.6@92.558,45.847 ; R4_2.6@93.358,45.847 R4_2.6@92.558,45.847 ; C3_2.2@114.262,47.742 114.362,47.742 C3_2.2@114.638,47.466 ; R4_2.6@92.558,45.847 96.58,45.847 97.3,45.127 104.924,45.127 105.233,44.817 115.14,44.817 115.287,44.964 115.287,46.817 C3_2.2@114.638,47.466 ; C3_2.2@114.638,47.466 119.056,47.466 X5_2.6@120.142,46.38 120.311,46.55 J1_2.4@132.706,46.55 ; J1_2.4@132.706,46.55 J1_2.4@132.875,46.719 J1_2.4@132.706,46.55
A-_3: C3_3.2 J1_3.4 R4_3.6 U2_3.1 X5_3.6 | length 50.8
  Top Layer w0.2: U2_3.1@89.202,9.83 90.932,9.83 92.126,11.024 R4_3.6@92.926,11.024 96.148,11.024 96.868,10.304 104.116,10.304 105.023,9.396 114.378,9.396 114.58,9.597 114.58,11.87 114.381,12.068 114.347,12.068 114.149,12.266 114.149,12.566 114.072,12.643 113.106,12.643 118.625,12.643 X5_3.6@119.71,11.557 119.88,11.727 132.274,11.727 J1_3.4@132.443,11.896
A_encoder_1: U1_1.14 X1.45 X2.20 | length 34.4
  Top Layer w0.3: X1.45@-12.44,53.591 -4.54,53.591 -0.56,49.611 6.38,49.611 X2.20@7.315,50.546 8.92,52.151 10.242,52.151 16.586,58.495
A_encoder_2: U1_2.14 X1.50 X2.28 | length 73.7
  Top Layer w0.3: X2.28@4.775,42.926 5.993,42.926 7.598,44.531 37.271,44.531 40.263,47.523 55.503,47.523 55.579,47.447
  Bottom Layer w0.3: X1.50@-12.44,51.991 -4.29,51.991 X2.28@4.775,42.926
A_encoder_3: U1_3.14 X1.57 X3.02 | length 64.3
  Top Layer w0.3: X1.57@-12.44,45.591 -2.462,45.591 2.057,41.072 5.353,41.072 7.366,39.058 X3.02@7.366,37.313 8.971,35.708 10.717,35.708 36.179,10.245
A_single_1: U1_1.3 U2_1.3 | length 11.9
  Top Layer w0.2: U1_1.3@80.239,79.299 84.874,79.299 85.458,78.715 90.107,78.715 90.691,79.299 U2_1.3@91.665,79.299
A_single_2: U1_2.3 U2_2.3 | length 10.2
  Top Layer w0.2: U1_2.3@79.934,47.193 82.015,47.193 82.615,47.793 88.134,47.793 88.734,47.193 U2_2.3@89.634,47.193
A_single_3: U1_3.3 U2_3.3 | length 10.2
  Top Layer w0.2: U1_3.3@79.502,12.37 81.583,12.37 82.183,12.97 87.702,12.97 88.302,12.37 U2_3.3@89.202,12.37
B+_1: J1_1.8 R2_1.1 R4_1.3 U2_1.14 X5_1.3 | length 58.3
  Top Layer w0.2: U2_1.14@86.765,79.299 87.665,79.299 89.535,81.169 93.769,81.169 95.486,82.886 95.883,82.886 95.888,82.882 R4_1.3@97.034,82.882 ; R4_1.3@97,82.805 99.205,82.805 99.941,83.541 108.008,83.541 109.068,84.601 R2_1.1@109.118,84.601 109.168,84.601 110.141,85.574 119.563,85.574 120.095,86.106 X5_1.3@120.447,86.106 120.696,85.857 121.157,85.857 121.214,85.8 133.6,85.8 135.1,84.3 136.6,84.3 137.2,83.7 137.2,81.4 136.02,80.22 J1_1.8@136.02,80.21
B+_2: J1_2.8 R2_2.1 R4_2.3 U2_2.14 X5_2.3 | length 60.6
  Top Layer w0.2: U2_2.14@84.734,47.193 84.796,47.255 86.423,47.255 v1(86.462,47.293) ; v1(91.384,49.098) 91.422,49.136 92.018,49.136 92.538,49.657 R4_2.3@93.358,49.657 94.158,49.657 94.884,50.383 94.884,51.367 97.6,54.083 107.38,54.083 108.834,52.629 108.884,52.629 R2_2.1@109.017,52.496 109.067,52.496 110.571,54 X5_2.3@120.142,54
  Bottom Layer w0.2: v1(86.462,47.293) 86.462,48.129 87.431,49.098 v1(91.384,49.098) ; X5_2.3@120.142,54 120.208,53.934 133.297,53.934 134.315,52.916 134.315,49.504 J1_2.8@135.715,48.104